# Altium PCB 6PCB.PcbDoc
Units mm, origin at the board's own origin, x right, y up, seen from the top; angles counter-clockwise.
Board outline 96.77 x 69.47 mm, 2 copper layers (Top Layer, Bottom Layer); 25 components, 28 nets, 195 pads, 4 vias.
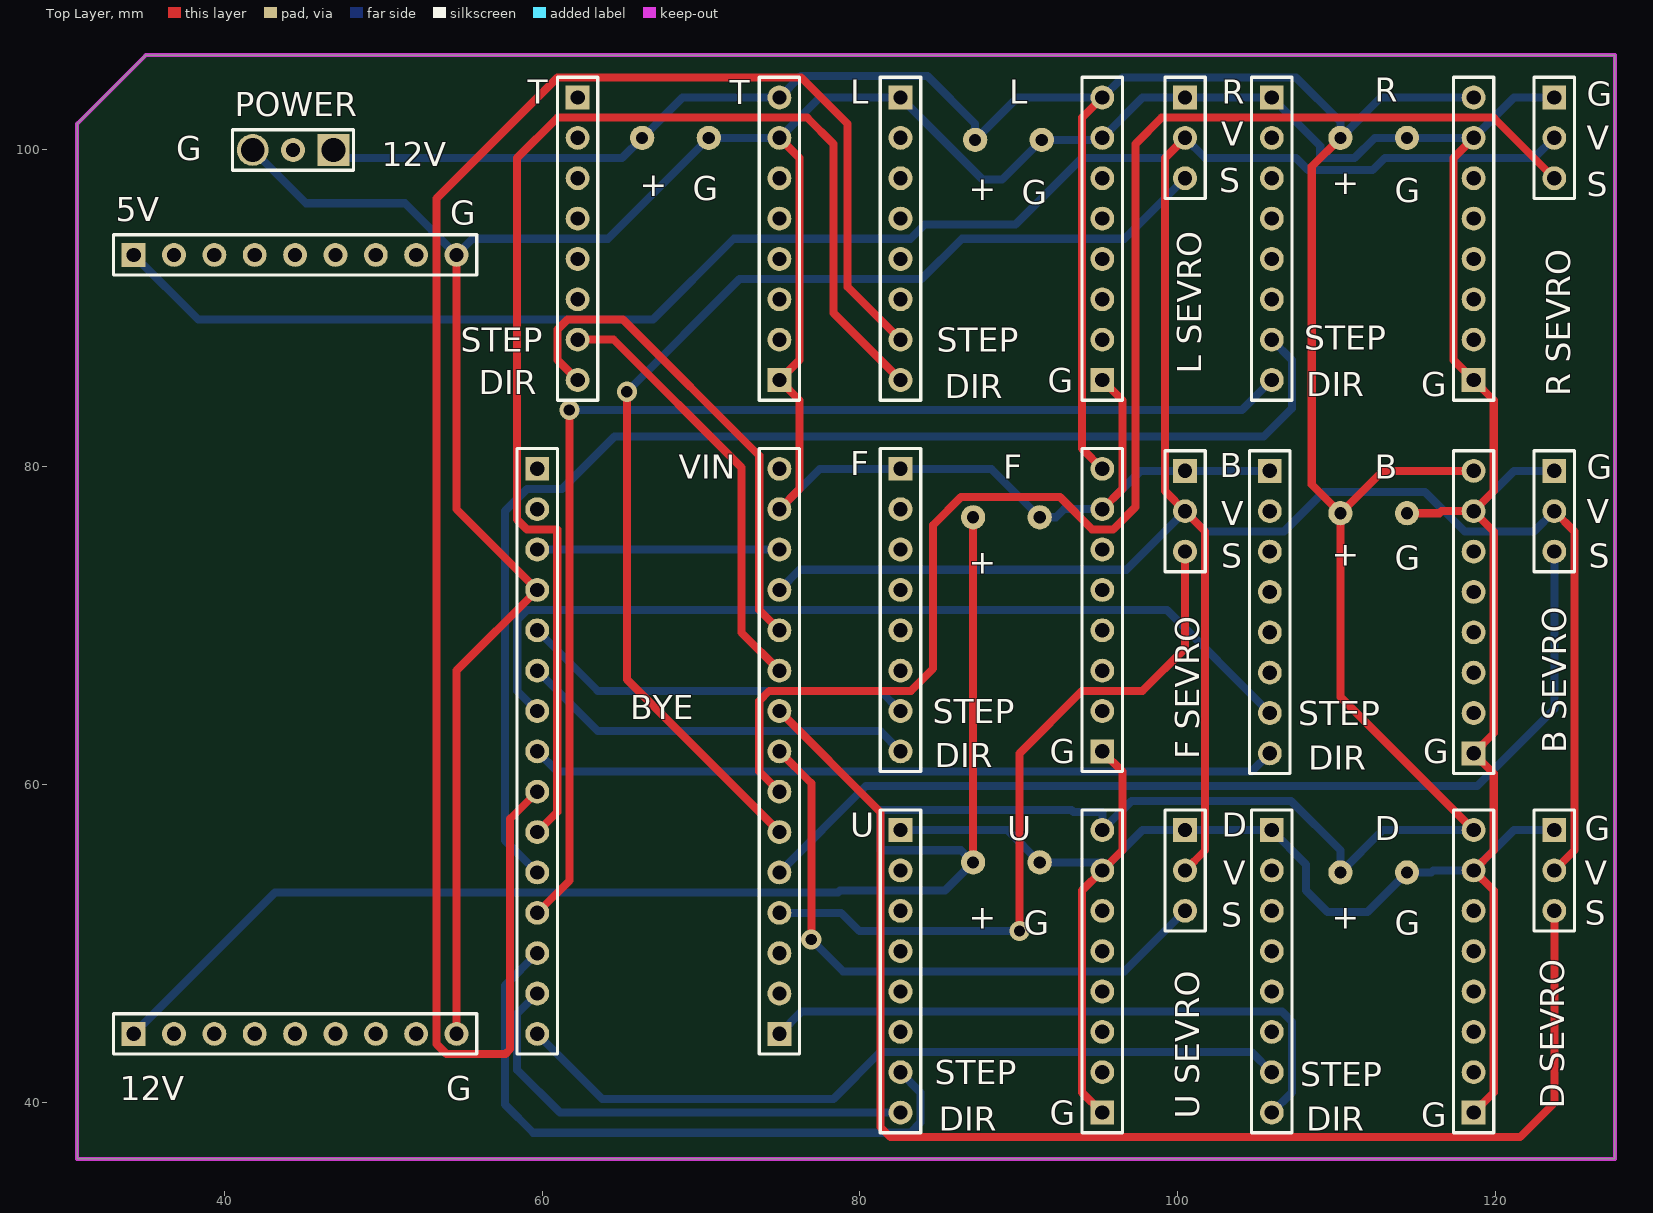
[diagram p0: Top Layer view]
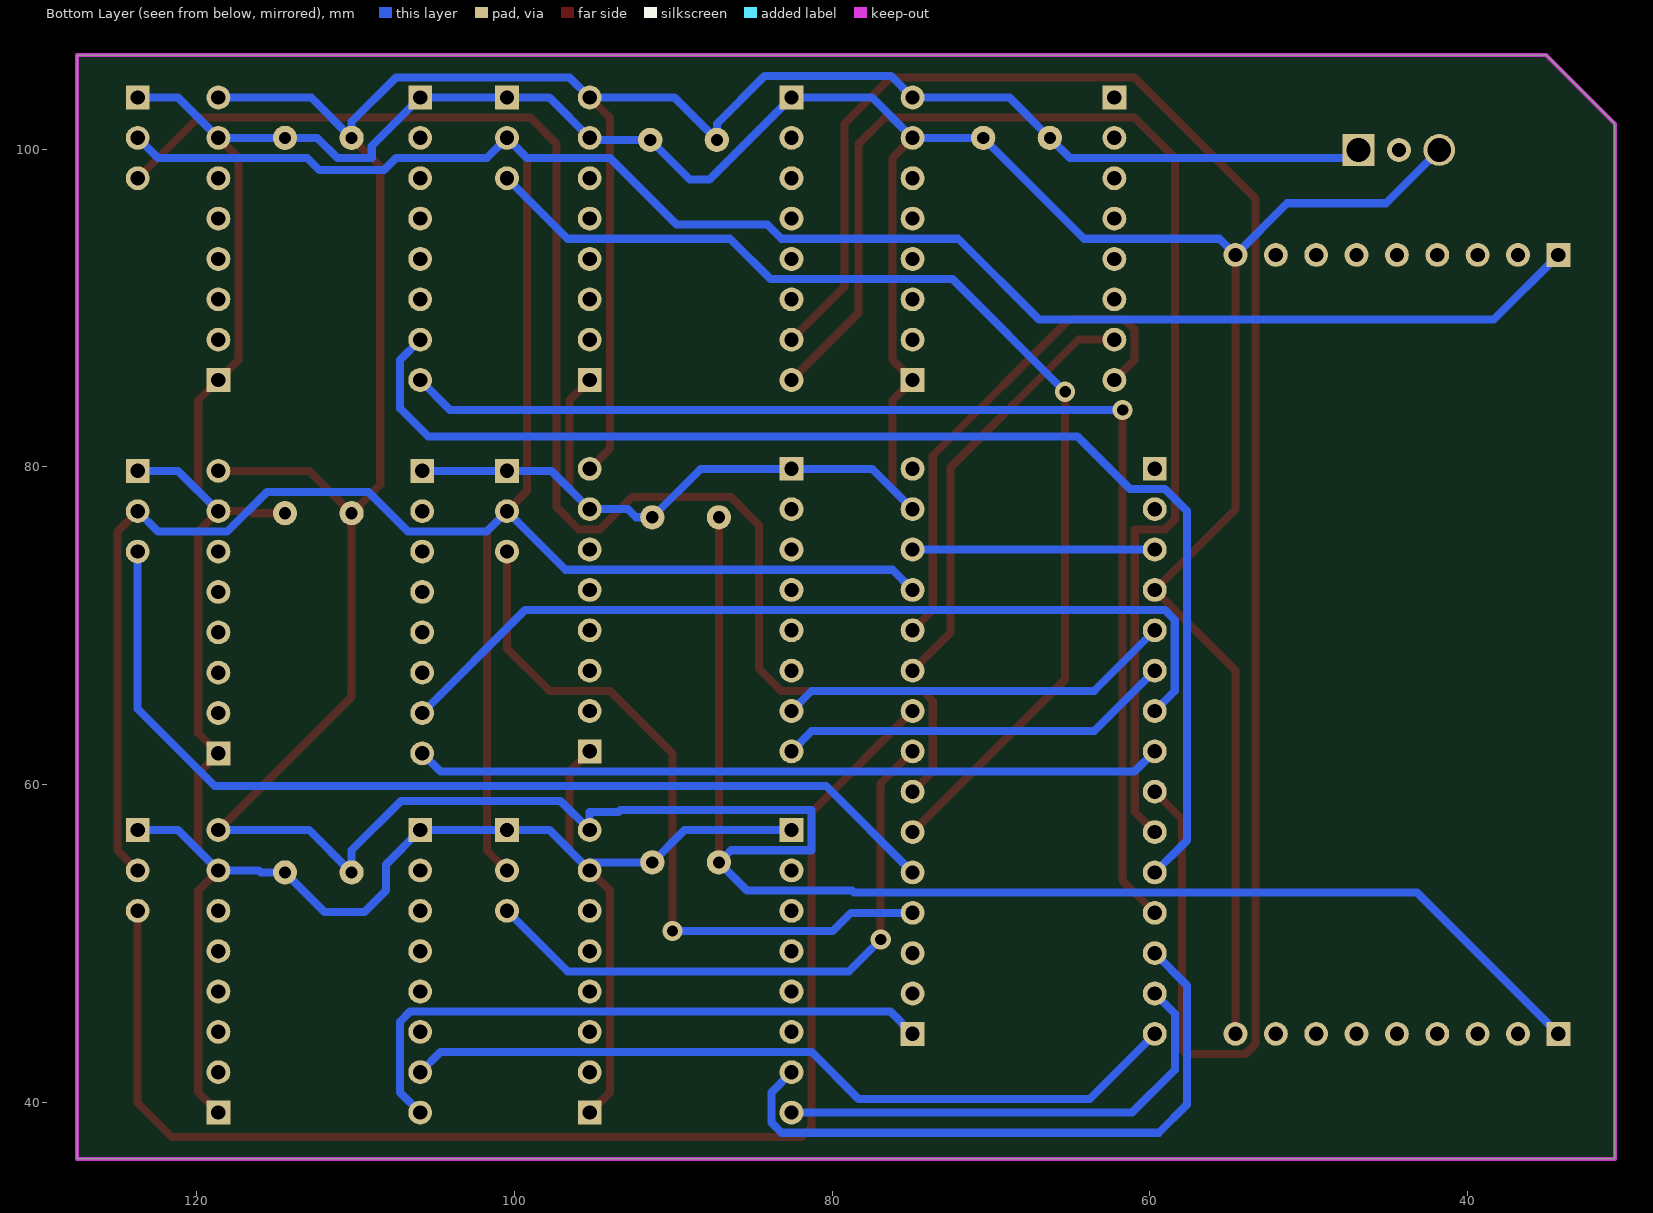
[diagram p1: Bottom Layer view, seen from below]

## Layer stack, top to bottom
Top Solder: solder mask 0.0102, Solder Resist, Dk 3.5
Top Layer: signal copper 0.0356
Dielectric 1: dielectric 0.32, FR-4, Dk 4.8
Bottom Layer: signal copper 0.0356
Bottom Solder: solder mask 0.0102, Solder Resist, Dk 3.5

## Board outline
30.734,36.449 127.508,36.449 127.508,105.918 35.052,105.918 34.693,105.559 30.734,101.6

## Design rules (kind name [scope] priority, off if disabled: settings)
Clearance [All] p1: gap=0.254
PolygonConnect [All] p1: connectstyle=Relief reliefconductorwidth=0.254 reliefentries=4 polygonreliefangle="90 Angle" airgapwidth=0.254
RoutingVias [All] p1: holewidth=0.711 width=1.27 viastyle="Through Hole" minholewidth=0.711 minwidth=1.27 maxholewidth=0.711 maxwidth=1.27
SolderMaskExpansion [All] p1: expansion=0.102
Width [All] p1: maxlimit=0.508 minlimit=0.508 preferedwidth=0.508 minimp=50.000000 maximp=50.000000 favimp=50.000000
30 further rules are at their usual default settings.

## Classes and differential pairs
component class 6PCB: 5V 12V B "B SEVRO" BYE D "D SEVRO" F "F SEVRO" L "L SEVRO" P? POWER R "R SEVRO" T U "U SEVRO" VIN

## Components (designator, comment, footprint, x,y, rotation, side; value= is the part's Value field where it differs from the comment)
5V "Header 9" HDR1X9 34.29,93.345 r0 top (schematic designator P?)
12V "Header 9" HDR1X9 34.29,44.323 r0 top (schematic designator P?)
B "Header 8" HDR1X8 105.791,79.756 r270 top
B "Header 8" HDR1X8 118.618,61.976 r90 top
"B SEVRO" "Header 3" HDR1X3#1 123.698,79.756 r270 top
BYE "Header 15" HDR1X15 59.69,79.883 r270 top (schematic designator P?)
D "Header 8" HDR1X8 105.918,57.15 r270 top
D "Header 8" HDR1X8 118.618,39.37 r90 top
"D SEVRO" "Header 3" HDR1X3#1 123.698,57.15 r270 top
F "Header 8" HDR1X8 82.55,79.883 r270 top
F "Header 8" HDR1X8 95.25,62.103 r90 top
"F SEVRO" "Header 3" HDR1X3#1 100.457,79.756 r270 top
L "Header 8" HDR1X8 82.55,103.251 r270 top
L "Header 8" HDR1X8 95.25,85.471 r90 top
"L SEVRO" "Header 3" HDR1X3#1 100.457,103.251 r270 top
POWER "Header 3" HDR1X3#2 46.863,99.949 r180 top
R "Header 8" HDR1X8 105.918,103.251 r270 top
R "Header 8" HDR1X8 118.618,85.471 r90 top
"R SEVRO" "Header 3" HDR1X3#1 123.698,103.251 r270 top
T "Header 8" HDR1X8 74.93,85.471 r90 top
T "Header 8" HDR1X8 62.23,103.251 r270 top
U "Header 8" HDR1X8 82.55,57.15 r270 top
U "Header 8" HDR1X8 95.25,39.37 r90 top
"U SEVRO" "Header 3" HDR1X3#1 100.457,57.15 r270 top
VIN "Header 15" HDR1X15 74.93,44.323 r90 top (schematic designator P?)

## Footprints (in the part's own frame and the unit in brackets; to place one, negate y for a bottom-side part, rotate by r counter-clockwise, add the part's x,y. Pads: shape width x height; smd on the part's side, far side on the other; paste and mask are expansions set on the pad)
HDR1X3#1 [mm] "Connector; Header; 3 Position"
  rect 1.5x1.5 hole 0.9: 1(0,0)
  round 1.5 hole 0.9: 2(2.54,0) 3(5.08,0)
  silkscreen extent -1.27,-1.27 6.35,1.27
HDR1X3#2 [mm] "Connector; Header; 3 Position"
  rect 2x2 hole 1.5: 1(0,0)
  round 1.5 hole 0.9: 2(2.54,0)
  round 2 hole 1.5: 3(5.08,0)
  silkscreen extent -1.27,-1.27 6.35,1.27
HDR1X8 [mm] "Connector; Header; 8 Position"
  rect 1.5x1.5 hole 0.9: 1(0,0)
  round 1.5 hole 0.9: 2(2.54,0) 3(5.08,0) 4(7.62,0) 5(10.16,0) 6(12.7,0) 7(15.24,0) 8(17.78,0)
  silkscreen extent -1.27,-1.27 19.05,1.27
HDR1X9 [mm] "Connector; Header; 9 Position"
  rect 1.5x1.5 hole 0.9: 1(0,0)
  round 1.5 hole 0.9: 2(2.54,0) 3(5.08,0) 4(7.62,0) 5(10.16,0) 6(12.7,0) 7(15.24,0) 8(17.78,0) 9(20.32,0)
  silkscreen extent -1.27,-1.27 21.59,1.27
HDR1X15 [mm] "Connector; Header; 15 Position"
  rect 1.5x1.5 hole 0.9: 1(0,0)
  round 1.5 hole 0.9: 2(2.54,0) 3(5.08,0) 4(7.62,0) 5(10.16,0) 6(12.7,0) 7(15.24,0) 8(17.78,0) 9(20.32,0) 10(22.86,0) 11(25.4,0) 12(27.94,0) 13(30.48,0) 14(33.02,0) 15(35.56,0)
  silkscreen extent -1.27,-1.27 36.83,1.27

## Part data
5V 12V: "Header, 9-Pin"
B B D D F F L L R R T T U U: "Header, 8-Pin"
"B SEVRO" "D SEVRO" "F SEVRO" "L SEVRO" POWER "R SEVRO" "U SEVRO": "Header, 3-Pin"
BYE VIN: "Header, 15-Pin"

## Free pads (board coordinates)
  round 1.524 hole 0.762: 6(66.294,100.711) 6(87.122,55.118) 6(87.122,76.835) 6(87.249,100.584) 6(110.236,54.483) 6(110.236,77.089) 6(110.236,100.711) 7(70.485,100.711) 7(91.313,55.118) 7(91.313,76.835) 7(91.44,100.584) 7(114.427,54.483) 7(114.427,77.089) 7(114.427,100.711)

## Via types
v1: diameter 1.27, hole 0.711, Top Layer to Bottom Layer, 4 vias

## Nets (pads, with @x,y where several pads share a name; then routed paths per layer and width w, separated by ;. In a path a pad name is that pad's centre, name@x,y a point inside that pad or via, vN(x,y) a via of type N, cw(c..) or ccw(c..) an arc to the next point about the centre after c; other vN are vias at no path point)
3V3: VIN.2
A0: "F SEVRO.3" VIN.4 | length 46
  Top Layer w0.508: v1(90.043,50.8) 90.043,61.976 93.98,65.913 97.79,65.913 100.457,68.58 100.457,74.676
  Bottom Layer w0.508: VIN.4 78.816,51.943 79.959,50.8 v1(90.043,50.8)
A1: "B SEVRO.3" VIN.5 | length 62.9
  Bottom Layer w0.508: VIN.5 80.366,59.919 118.847,59.919 123.698,64.77 123.698,74.676
A2: "L SEVRO.3" VIN.6 | length 72.4
  Top Layer w0.508: v1(65.329,84.734) 65.329,66.624 VIN.6
  Bottom Layer w0.508: v1(65.329,84.734) 72.415,91.821 83.871,91.821 86.411,94.361 96.647,94.361 100.457,98.171
A3: "R SEVRO.3" VIN.7 | length 93.4
  Top Layer w0.508: VIN.7 73.66,60.833 73.66,65.278 74.295,65.913 83.21,65.913 84.607,67.31 84.607,76.352 86.36,78.105 92.583,78.105 94.615,76.073 95.936,76.073 97.333,77.47 97.333,100.33 98.984,101.981 119.888,101.981 123.698,98.171
A4: "U SEVRO.3" VIN.8 | length 38.6
  Top Layer w0.508: VIN.8 76.937,60.096 v1(76.937,50.267)
  Bottom Layer w0.508: v1(76.937,50.267) 78.943,48.26 96.647,48.26 100.457,52.07
A5: "D SEVRO.3" VIN.9 | length 84.5
  Top Layer w0.508: VIN.9 81.28,58.293 81.28,38.456 81.915,37.821 121.539,37.821 123.698,39.98 123.698,52.07
A6: T.7@62.23,88.011 VIN.10 | length 27.4
  Top Layer w0.508: T.7@62.23,88.011 64.502,88.011 72.542,79.971 72.542,69.571 VIN.10
A7: T.8@62.23,85.471 VIN.11 | length 31.7
  Top Layer w0.508: T.8@62.23,85.471 60.96,86.741 60.96,88.646 61.595,89.281 65.087,89.281 73.66,80.709 73.66,70.993 VIN.11
D2: BYE.5 F.7@82.55,64.643 | length 25
  Bottom Layer w0.508: BYE.5 63.5,65.913 81.28,65.913 F.7@82.55,64.643
D3: BYE.6 F.8@82.55,62.103 | length 25
  Bottom Layer w0.508: BYE.6 63.5,63.373 81.28,63.373 F.8@82.55,62.103
D4: B.7@105.791,64.516 BYE.7 | length 56.5
  Bottom Layer w0.508: BYE.7 58.432,65.901 58.432,70.37 59.055,70.993 99.314,70.993 B.7@105.791,64.516
D5: B.8@105.791,61.976 BYE.8 | length 47.1
  Bottom Layer w0.508: BYE.8 60.96,60.833 104.648,60.833 B.8@105.791,61.976
D6: BYE.9 L.7@82.55,88.011 | length 120.4
  Top Layer w0.508: BYE.9 57.988,57.861 57.988,43.358 57.683,43.053 53.975,43.053 53.34,43.688 53.34,96.901 60.96,104.521 76.302,104.521 79.223,101.6 79.223,91.338 L.7@82.55,88.011
D7: BYE.10 L.8@82.55,85.471 | length 83.4
  Top Layer w0.508: BYE.10 60.948,58.281 60.948,76.061 59.055,76.061 58.42,76.696 58.42,99.441 60.96,101.981 76.683,101.981 78.334,100.33 78.334,89.687 L.8@82.55,85.471
D8: BYE.11 R.7@105.918,88.011 | length 80.6
  Bottom Layer w0.508: BYE.11 57.67,56.503 57.67,77.228 59.055,78.613 61.239,78.613 64.541,81.915 105.41,81.915 107.188,83.693 107.188,86.741 R.7@105.918,88.011
D9: BYE.12 R.8@105.918,85.471 | length 77.5
  Top Layer w0.508: BYE.12 61.71,53.963 v1(61.71,83.586)
  Bottom Layer w0.508: v1(61.71,83.586) 104.033,83.586 R.8@105.918,85.471
D10: BYE.13 U.7@82.55,41.91 | length 41.2
  Bottom Layer w0.508: BYE.13 57.658,47.371 57.658,39.878 59.436,38.1 83.185,38.1 83.82,38.735 83.82,40.64 U.7@82.55,41.91
D11: BYE.14 U.8@82.55,39.37 | length 30.6
  Bottom Layer w0.508: BYE.14 58.42,45.593 58.42,42.062 61.112,39.37 U.8@82.55,39.37
D12: BYE.15 D.7@105.918,41.91 | length 49.7
  Bottom Layer w0.508: BYE.15 63.779,40.234 78.334,40.234 81.28,43.18 104.648,43.18 D.7@105.918,41.91
D13: D.8@105.918,39.37 VIN.1 | length 39.3
  Bottom Layer w0.508: VIN.1 76.327,45.72 106.553,45.72 107.188,45.085 107.188,40.64 D.8@105.918,39.37
GND: 5V.9 12V.9 "B SEVRO.1" "D SEVRO.1" "F SEVRO.1" "L SEVRO.1" "R SEVRO.1" "U SEVRO.1" B.1 B.7@118.618,77.216 BYE.4 D.1 D.7@118.618,54.61 F.1 F.7@95.25,77.343 L.1 L.7@95.25,100.711 pad.7 POWER.3 R.1 R.7@118.618,100.711 T.1@74.93,85.471 T.7@74.93,100.711 U.1 U.7@95.25,54.61 VIN.14 | length 369.6
  Top Layer w0.508: 12V.9 54.61,67.183 BYE.4 54.61,77.343 5V.9 ; VIN.14 76.2,78.613 76.2,84.201 74.93,85.471 76.2,86.741 76.2,99.441 T.7@74.93,100.711 ; U.1@95.25,39.37 93.98,40.64 93.98,53.34 95.25,54.61 96.52,55.88 96.52,60.833 F.1@95.25,62.103 ; F.7@95.25,77.343 96.52,78.613 96.52,84.201 L.1@95.25,85.471 ; pad.7@114.427,77.089 116.459,77.089 116.586,77.216 B.7@118.618,77.216 ; D.1@118.618,39.37 119.888,40.64 119.888,53.34 118.618,54.61 119.888,55.88 119.888,60.706 118.618,61.976 119.888,63.246 119.888,75.946 B.7@118.618,77.216 ; R.7@118.618,100.711 117.348,99.441 117.348,86.741 118.618,85.471 119.888,84.201 119.888,78.486 B.7@118.618,77.216
  Bottom Layer w0.508: POWER.3 45.136,96.596 51.359,96.596 5V.9 55.626,94.361 64.135,94.361 70.485,100.711 74.93,100.711 77.47,103.251 82.55,103.251 87.706,98.095 88.951,98.095 91.44,100.584 95.25,100.584 95.25,100.711 97.79,103.251 100.457,103.251 105.918,103.251 108.966,100.203 108.966,99.441 111.125,99.441 112.395,100.711 114.427,100.711 118.618,100.711 121.158,103.251 123.698,103.251 ; VIN.14 77.47,79.883 82.55,79.883 88.265,79.883 91.313,76.835 92.329,76.835 92.837,77.343 95.25,77.343 97.663,79.756 100.457,79.756 B.1@105.791,79.756 ; U.1@82.55,57.15 89.281,57.15 91.313,55.118 95.25,55.118 95.25,54.61 97.79,57.15 100.457,57.15 105.918,57.15 108.077,54.991 108.077,53.34 109.423,51.994 111.938,51.994 114.427,54.483 115.951,54.483 116.078,54.61 118.618,54.61 121.158,57.15 123.698,57.15 ; B.7@118.618,77.216 121.158,79.756 123.698,79.756
REF: VIN.3
RST: BYE.3 VIN.13 | length 15.2
  Bottom Layer w0.508: BYE.3 VIN.13
RX: BYE.2
TX: BYE.1
VCC: 5V.1 "B SEVRO.2" "D SEVRO.2" "F SEVRO.2" "L SEVRO.2" "R SEVRO.2" "U SEVRO.2" VIN.12 | length 223.3
  Top Layer w0.508: 100.457,54.61 101.727,55.88 101.727,75.946 100.457,77.216 99.187,78.486 99.187,99.441 100.457,100.711 ; 123.698,54.61 124.968,55.88 124.968,75.946 123.698,77.216
  Bottom Layer w0.508: 5V.1 38.354,89.281 66.98,89.281 72.06,94.361 83.185,94.361 84.074,95.25 89.789,95.25 93.98,99.441 99.187,99.441 100.457,100.711 101.727,99.441 107.442,99.441 108.204,98.679 112.268,98.679 113.03,99.441 122.428,99.441 123.698,100.711 ; VIN.12 76.2,73.533 96.774,73.533 100.457,77.216 101.727,75.946 106.68,75.946 109.169,78.435 115.57,78.435 118.059,75.946 122.428,75.946 123.698,77.216
VIN: 12V.1 B.8@118.618,79.756 D.8@118.618,57.15 F.8@95.25,79.883 L.8@95.25,103.251 pad.6 POWER.1 R.8@118.618,103.251 T.8@74.93,103.251 U.8@95.25,57.15 | length 294.7
  Top Layer w0.508: pad.6@87.122,55.118 pad.6@87.122,76.835 ; F.8@95.25,79.883 93.98,81.153 93.98,101.981 L.8@95.25,103.251 ; pad.6@110.236,100.711 108.433,98.908 108.433,78.892 pad.6@110.236,77.089 ; D.8@118.618,57.15 110.236,65.532 pad.6@110.236,77.089 ; B.8@118.618,79.756 112.903,79.756 pad.6@110.236,77.089
  Bottom Layer w0.508: 12V.1 43.18,53.213 78.613,53.213 78.74,53.34 85.344,53.34 87.122,55.118 86.36,55.88 81.28,55.88 81.28,58.42 93.32,58.42 93.447,58.293 95.25,58.293 95.25,57.15 97.079,58.979 107.137,58.979 110.236,55.88 110.236,54.483 112.903,57.15 D.8@118.618,57.15 ; POWER.1 46.863,99.441 65.024,99.441 66.294,100.711 68.834,103.251 74.93,103.251 76.276,104.597 84.252,104.597 87.249,101.6 87.249,100.584 89.916,103.251 95.25,103.251 96.52,104.521 107.442,104.521 110.236,101.727 110.236,100.711 112.776,103.251 R.8@118.618,103.251
pads on no net: 5V.2 5V.3 5V.4 5V.5 5V.6 5V.7 5V.8 12V.2 12V.3 12V.4 12V.5 12V.6 12V.7 12V.8 B.2 B.3 B.4 B.5 B.6 D.2 D.3 D.4 D.5 D.6 F.2 F.3 F.4 F.5 F.6 L.2 L.3 L.4 L.5 L.6 POWER.2 R.2 R.3 R.4 R.5 R.6 T.1@62.23,103.251 T.2 T.3 T.4 T.5 T.6 U.2 U.3 U.4 U.5 U.6 VIN.15

## Keep-outs
Keep-Out Layer:
  lines w0.254: 30.734,36.449 33.02,36.449 127.508,36.449 127.508,105.918 35.052,105.918 34.693,105.559 30.734,101.6 30.734,36.449

## Silkscreen, mask and mechanical layers (free items; w line width, h text height)
Top Overlay:
  text "G" at 125.73,102.743 h1.52
  text "V" at 102.743,100.203 h1.52
  text "V" at 125.73,99.949 h1.52
  text "G" at 36.957,99.314 h1.52
  text "12V" at 49.911,98.933 h1.52
  text "S" at 102.616,97.282 h1.52
  text "+" at 109.703,97.155 h1.52
  text "+" at 66.142,97.028 h1.52
  text "S" at 125.73,97.028 h1.52
  text "G" at 69.469,96.774 h1.52
  text "+" at 86.843,96.774 h1.52
  text "G" at 113.665,96.647 h1.52
  text "G" at 90.17,96.52 h1.52
  text "G" at 54.229,95.25 h1.52
  text "STEP" at 107.95,87.376 h1.52
  text "STEP" at 54.864,87.249 h1.52
  text "STEP" at 84.836,87.249 h1.52
  text "G" at 91.821,84.709 h1.52
  text "DIR" at 56.007,84.582 h1.52
  text "DIR" at 108.077,84.455 h1.52
  text "G" at 115.316,84.455 h1.52
  text "DIR" at 85.344,84.328 h1.52
  text "G" at 125.73,79.248 h1.52
  text "V" at 125.73,76.454 h1.52
  text "V" at 102.743,76.327 h1.52
  text "+" at 109.703,73.787 h1.52
  text "S" at 102.743,73.66 h1.52
  text "S" at 125.857,73.66 h1.52
  text "G" at 113.665,73.533 h1.52
  text "+" at 86.843,73.279 h1.52
  text "STEP" at 84.582,63.881 h1.52
  text "STEP" at 107.569,63.754 h1.52
  text "G" at 91.948,61.341 h1.52
  text "G" at 115.443,61.341 h1.52
  text "DIR" at 84.709,61.087 h1.52
  text "DIR" at 108.204,60.96 h1.52
  text "G" at 125.603,56.515 h1.52
  text "V" at 102.87,53.721 h1.52
  text "V" at 125.603,53.721 h1.52
  text "S" at 125.603,51.181 h1.52
  text "S" at 102.743,51.054 h1.52
  text "+" at 86.843,50.927 h1.52
  text "+" at 109.703,50.927 h1.52
  text "G" at 90.297,50.546 h1.52
  text "G" at 113.665,50.546 h1.52
  text "STEP" at 84.709,41.148 h1.52
  text "STEP" at 107.696,41.021 h1.52
  text "G" at 53.975,40.132 h1.52
  text "G" at 91.948,38.608 h1.52
  text "G" at 115.316,38.481 h1.52
  text "DIR" at 84.963,38.227 h1.52
  text "DIR" at 108.077,38.227 h1.52